# Altium PCB PLATE_FP_K2M_rev4_1.PcbDoc
Units mm, origin at the board's own origin, x right, y up, seen from the top; angles counter-clockwise.
Board outline 22.7 x 69.9 mm, 6 copper layers (Top Layer, Top, Mid-Layer 3, POW1, Mid-Layer 1, FLEX1, Mid-Layer 2, FLEX2, Mid-Layer 4, POW3, Bottom Layer, Bottom); 28 components, 14 nets, 104 pads, 64 vias.
Unrouted connection lines stored in the file: 3.
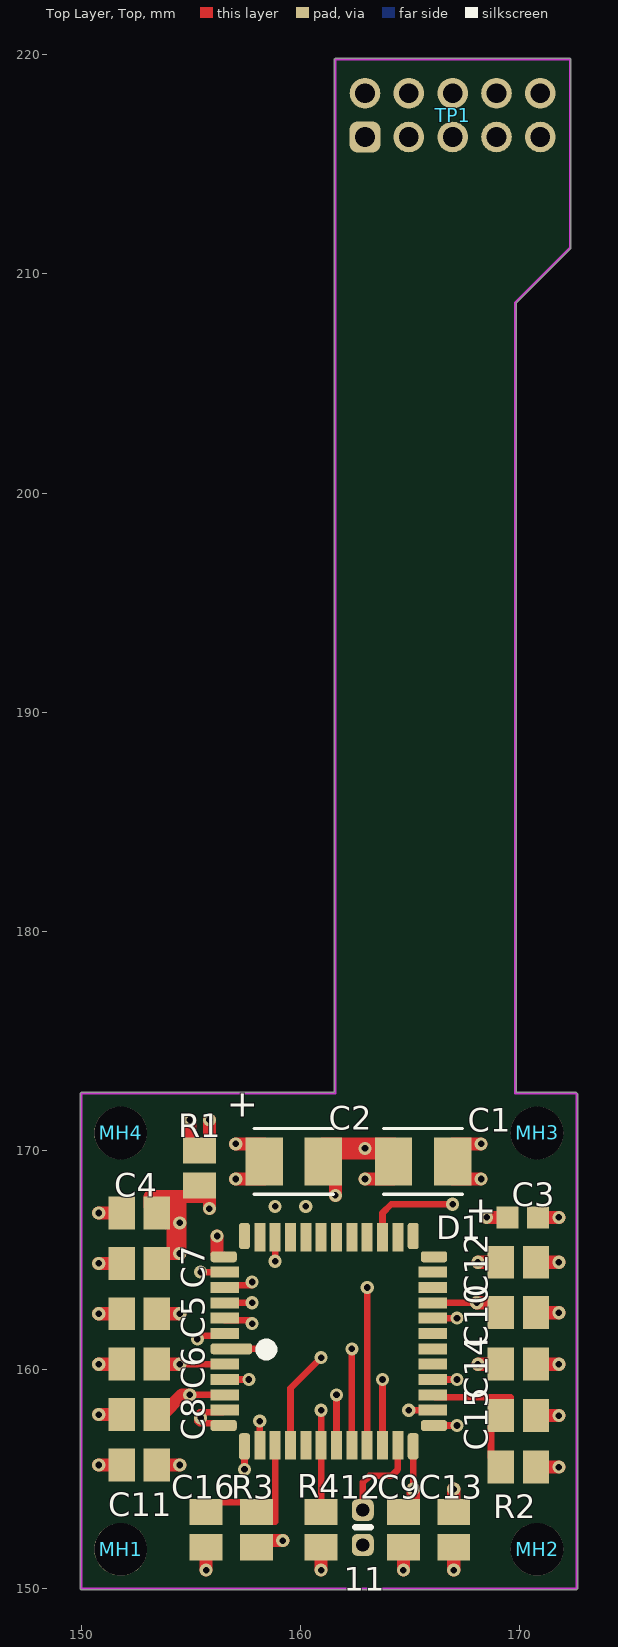
[diagram p0: Top Layer, Top view]
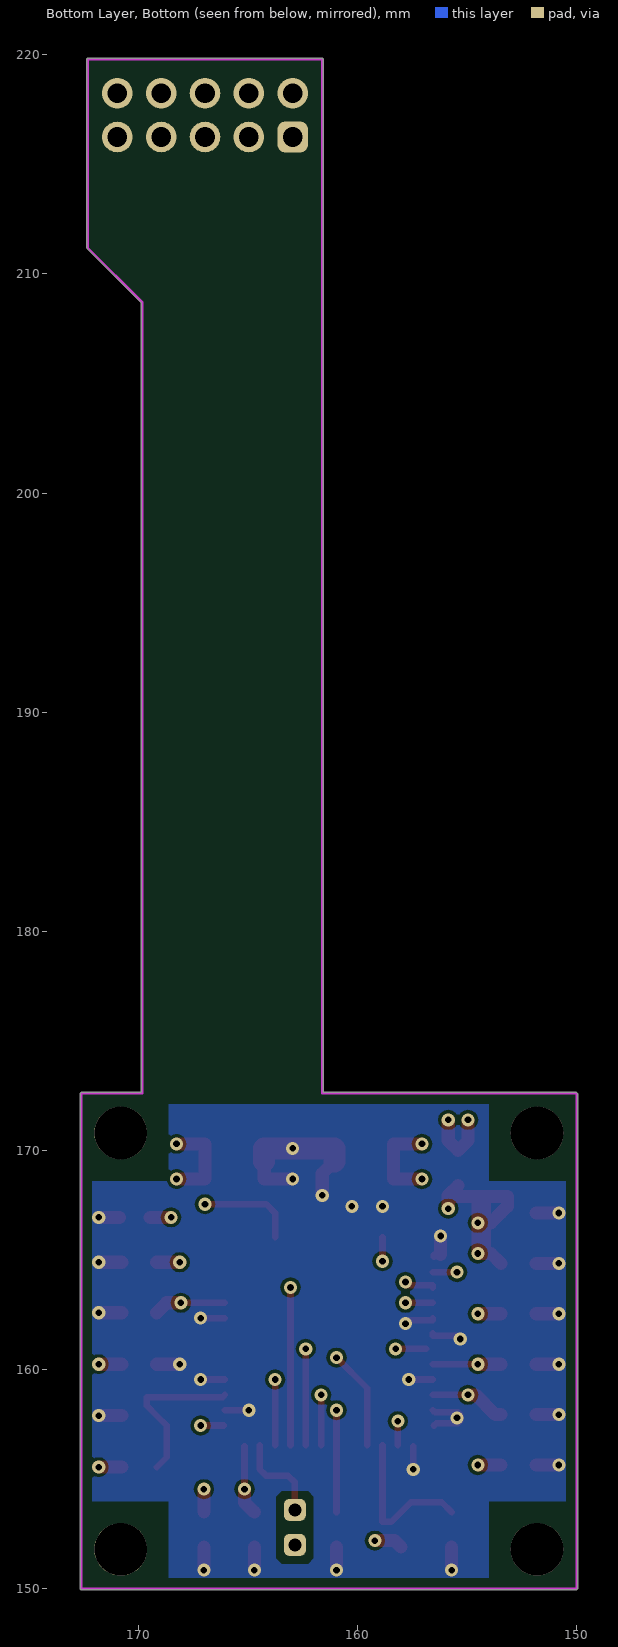
[diagram p1: Bottom Layer, Bottom view, seen from below]
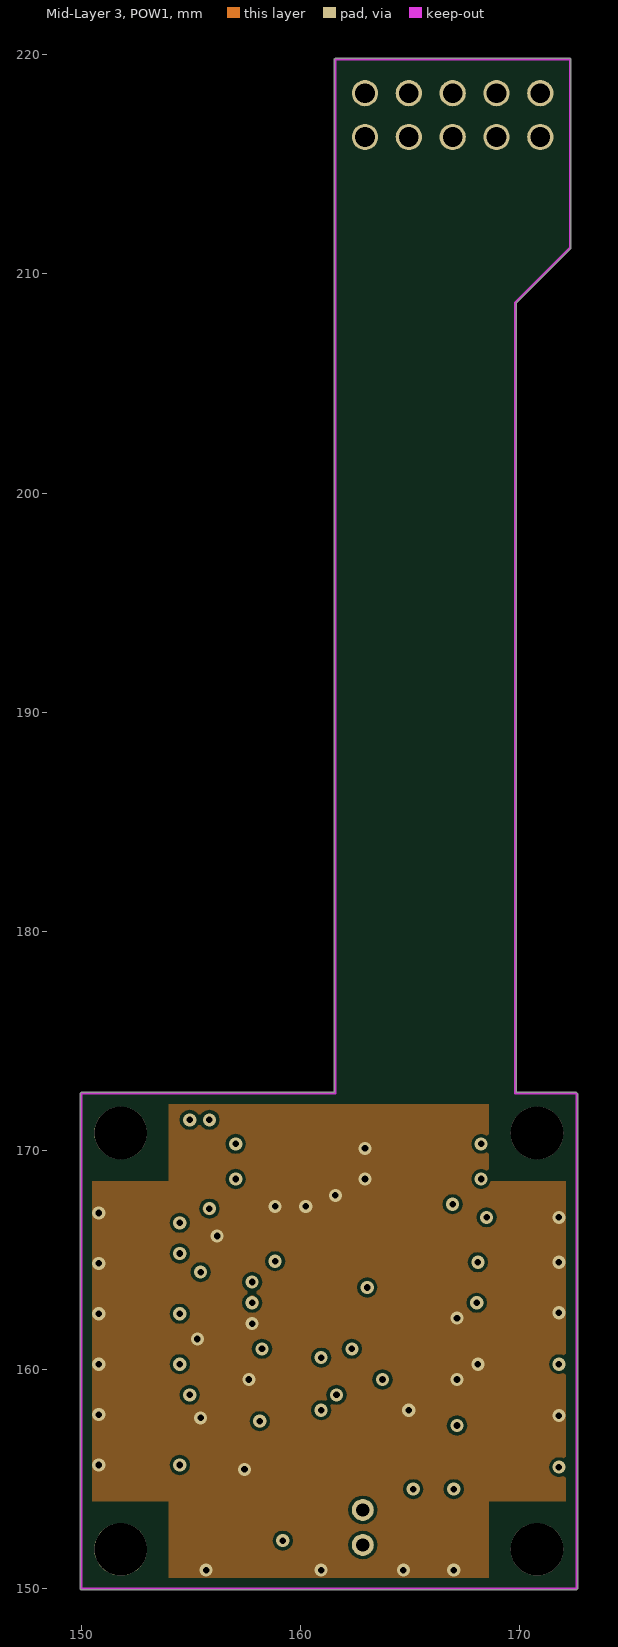
[diagram p2: Mid-Layer 3, POW1]
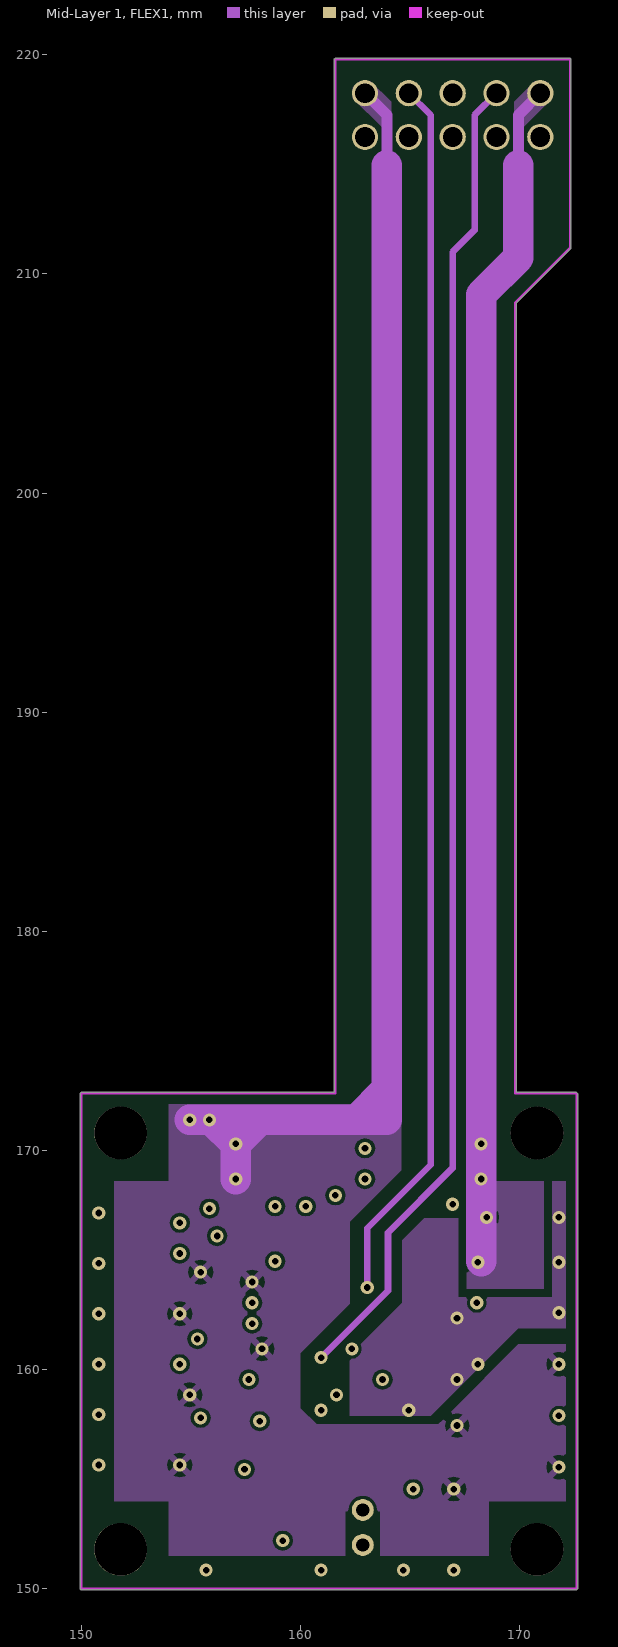
[diagram p3: Mid-Layer 1, FLEX1]
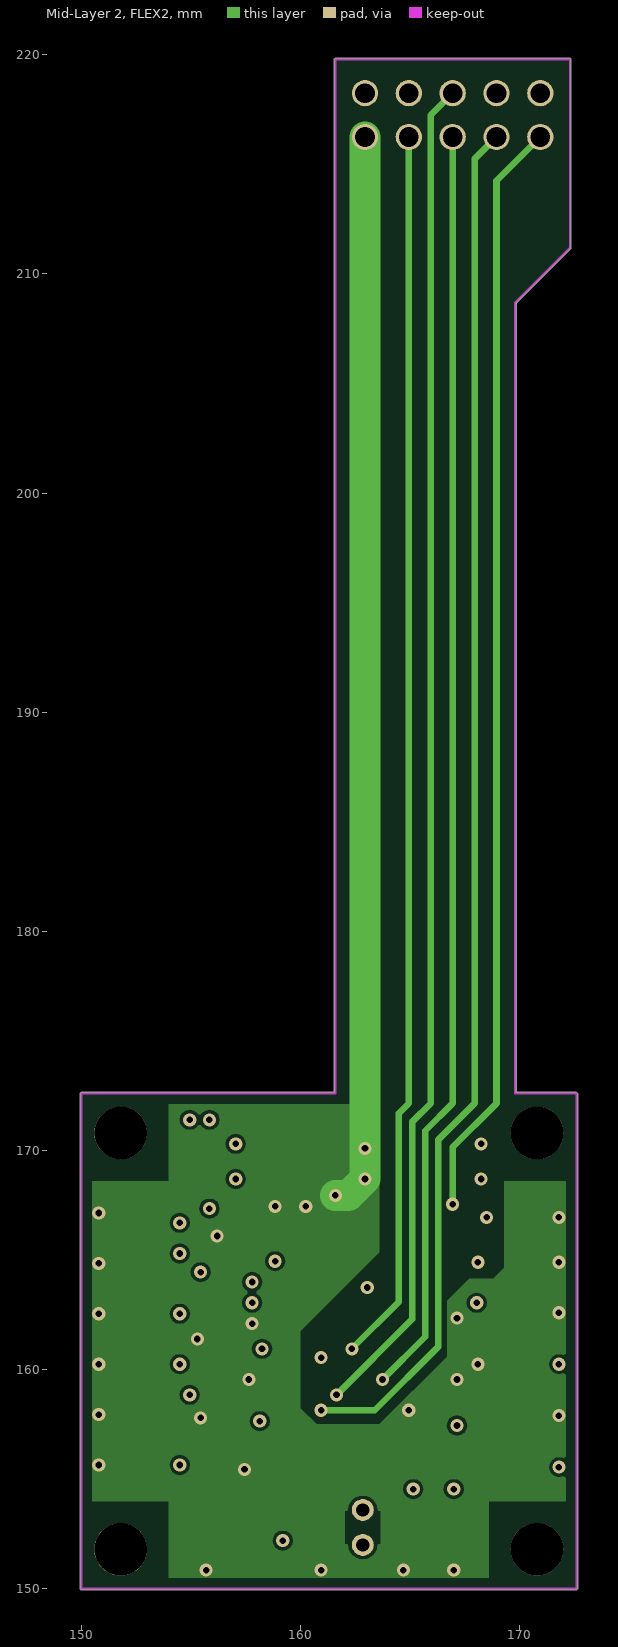
[diagram p4: Mid-Layer 2, FLEX2]
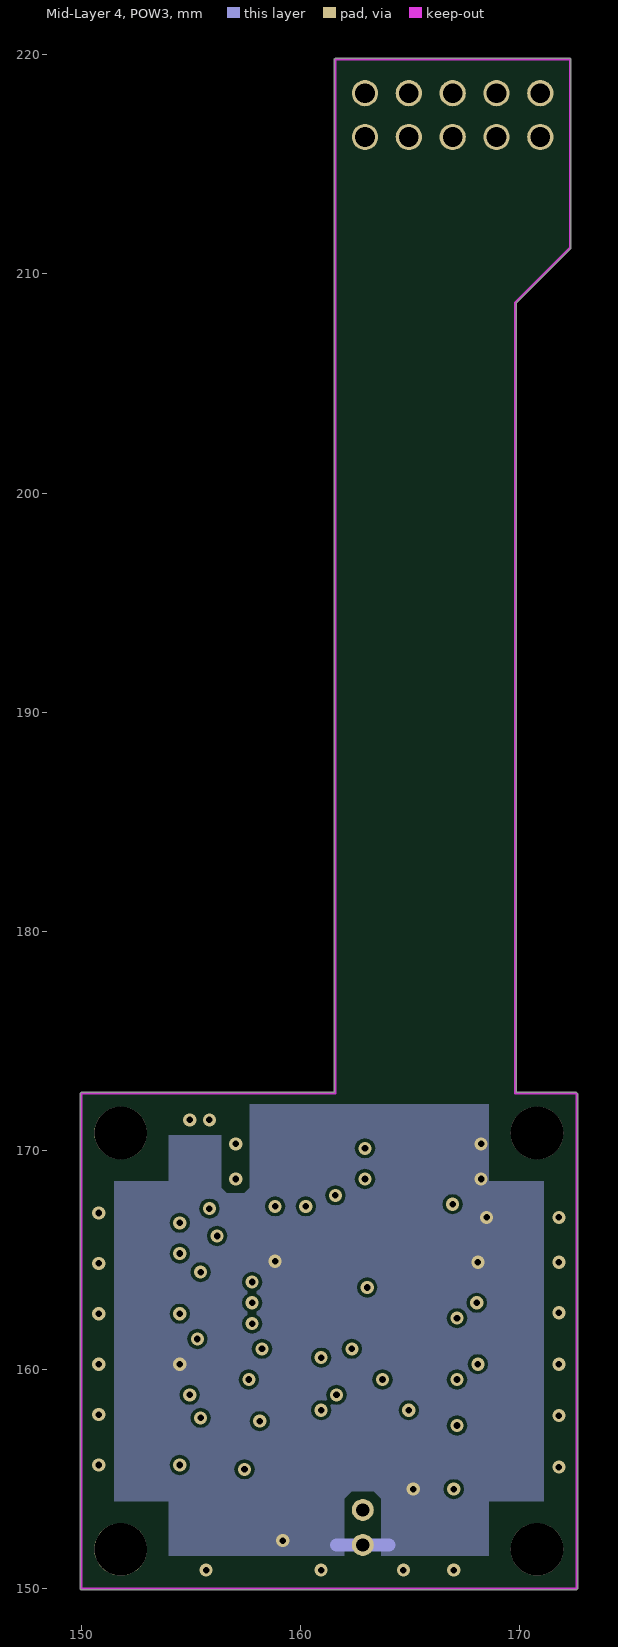
[diagram p5: Mid-Layer 4, POW3]

## Layer stack, top to bottom
Top Solder, Top Mask: solder mask 0.0102, Solder Resist, Dk 3.5
Top Layer, Top: signal copper 0.0356
Dielectric 1: dielectric 0.32, FR-4, Dk 4.8
Mid-Layer 3, POW1: signal copper 0.0356
Dielectric2: dielectric 0.32, FR-4, Dk 4.8
Mid-Layer 1, FLEX1: signal copper 0.0356
Dielectric3: dielectric 0.32, FR-4, Dk 4.8
Mid-Layer 2, FLEX2: signal copper 0.0356
Dielectric4: dielectric 0.32, FR-4, Dk 4.8
Mid-Layer 4, POW3: signal copper 0.0356
Dielectric5: dielectric 0.32, FR-4, Dk 4.8
Bottom Layer, Bottom: signal copper 0.0356
Bottom Solder, Bot Mask: solder mask 0.0102, Solder Resist, Dk 3.5

## Board outline
149.95,150 150,149.95 172.6,149.95 172.65,150 172.65,172.6 172.6,172.65 169.85,172.65 169.85,208.679 172.335,211.164 172.335,211.165 172.35,211.2 172.35,219.8 172.3,219.85 161.6,219.85 161.55,219.8 161.55,172.65 150,172.65 149.95,172.6

## Design rules (kind name [scope] priority, off if disabled: settings)
Clearance "Clearance_Top Layer, Top_PadToPad" [ExistsOnLayer('Top Layer, Top') And IsPad vs ExistsOnLayer('Top Layer, Top') And IsPad] p1: gap=0.15
Clearance "Clearance_Top Layer, Top_PadToLine" [ExistsOnLayer('Top Layer, Top') And IsPad vs ExistsOnLayer('Top Layer, Top') And IsWire] p2: gap=0.15
Clearance "Clearance_Top Layer, Top_LineToLine" [ExistsOnLayer('Top Layer, Top') And IsWire vs ExistsOnLayer('Top Layer, Top') And IsWire] p3: gap=0.15
Clearance "Clearance_Top Layer, Top_ViaToPad" [ExistsOnLayer('Top Layer, Top') And IsVia vs ExistsOnLayer('Top Layer, Top') And IsPad] p4: gap=0.15
Clearance "Clearance_Top Layer, Top_ViaToLine" [ExistsOnLayer('Top Layer, Top') And IsVia vs ExistsOnLayer('Top Layer, Top') And IsWire] p5: gap=0.15
Clearance "Clearance_Top Layer, Top_ViaToVia" [ExistsOnLayer('Top Layer, Top') And IsVia vs ExistsOnLayer('Top Layer, Top') And IsVia] p6: gap=0.15
Clearance "Clearance_Mid-Layer 3, POW1_PadToPad" [ExistsOnLayer('Mid-Layer 3, POW1') And IsPad vs ExistsOnLayer('Mid-Layer 3, POW1') And IsPad] p7: gap=0.15
Clearance "Clearance_Mid-Layer 3, POW1_PadToLine" [ExistsOnLayer('Mid-Layer 3, POW1') And IsPad vs ExistsOnLayer('Mid-Layer 3, POW1') And IsWire] p8: gap=0.15
Clearance "Clearance_Mid-Layer 3, POW1_LineToLine" [ExistsOnLayer('Mid-Layer 3, POW1') And IsWire vs ExistsOnLayer('Mid-Layer 3, POW1') And IsWire] p9: gap=0.15
Clearance "Clearance_Mid-Layer 3, POW1_ViaToPad" [ExistsOnLayer('Mid-Layer 3, POW1') And IsVia vs ExistsOnLayer('Mid-Layer 3, POW1') And IsPad] p10: gap=0.15
Clearance "Clearance_Mid-Layer 3, POW1_ViaToLine" [ExistsOnLayer('Mid-Layer 3, POW1') And IsVia vs ExistsOnLayer('Mid-Layer 3, POW1') And IsWire] p11: gap=0.15
Clearance "Clearance_Mid-Layer 3, POW1_ViaToVia" [ExistsOnLayer('Mid-Layer 3, POW1') And IsVia vs ExistsOnLayer('Mid-Layer 3, POW1') And IsVia] p12: gap=0.15
Clearance "Clearance_Mid-Layer 1, FLEX1_PadToPad" [ExistsOnLayer('Mid-Layer 1, FLEX1') And IsPad vs ExistsOnLayer('Mid-Layer 1, FLEX1') And IsPad] p13: gap=0.15
Clearance "Clearance_Mid-Layer 1, FLEX1_PadToLine" [ExistsOnLayer('Mid-Layer 1, FLEX1') And IsPad vs ExistsOnLayer('Mid-Layer 1, FLEX1') And IsWire] p14: gap=0.15
Clearance "Clearance_Mid-Layer 1, FLEX1_LineToLine" [ExistsOnLayer('Mid-Layer 1, FLEX1') And IsWire vs ExistsOnLayer('Mid-Layer 1, FLEX1') And IsWire] p15: gap=0.15
Clearance "Clearance_Mid-Layer 1, FLEX1_ViaToPad" [ExistsOnLayer('Mid-Layer 1, FLEX1') And IsVia vs ExistsOnLayer('Mid-Layer 1, FLEX1') And IsPad] p16: gap=0.15
Clearance "Clearance_Mid-Layer 1, FLEX1_ViaToLine" [ExistsOnLayer('Mid-Layer 1, FLEX1') And IsVia vs ExistsOnLayer('Mid-Layer 1, FLEX1') And IsWire] p17: gap=0.15
Clearance "Clearance_Mid-Layer 1, FLEX1_ViaToVia" [ExistsOnLayer('Mid-Layer 1, FLEX1') And IsVia vs ExistsOnLayer('Mid-Layer 1, FLEX1') And IsVia] p18: gap=0.15
Clearance "Clearance_Mid-Layer 2, FLEX2_PadToPad" [ExistsOnLayer('Mid-Layer 2, FLEX2') And IsPad vs ExistsOnLayer('Mid-Layer 2, FLEX2') And IsPad] p19: gap=0.15
Clearance "Clearance_Mid-Layer 2, FLEX2_PadToLine" [ExistsOnLayer('Mid-Layer 2, FLEX2') And IsPad vs ExistsOnLayer('Mid-Layer 2, FLEX2') And IsWire] p20: gap=0.15
Clearance "Clearance_Mid-Layer 2, FLEX2_LineToLine" [ExistsOnLayer('Mid-Layer 2, FLEX2') And IsWire vs ExistsOnLayer('Mid-Layer 2, FLEX2') And IsWire] p21: gap=0.15
Clearance "Clearance_Mid-Layer 2, FLEX2_ViaToPad" [ExistsOnLayer('Mid-Layer 2, FLEX2') And IsVia vs ExistsOnLayer('Mid-Layer 2, FLEX2') And IsPad] p22: gap=0.15
Clearance "Clearance_Mid-Layer 2, FLEX2_ViaToLine" [ExistsOnLayer('Mid-Layer 2, FLEX2') And IsVia vs ExistsOnLayer('Mid-Layer 2, FLEX2') And IsWire] p23: gap=0.15
Clearance "Clearance_Mid-Layer 2, FLEX2_ViaToVia" [ExistsOnLayer('Mid-Layer 2, FLEX2') And IsVia vs ExistsOnLayer('Mid-Layer 2, FLEX2') And IsVia] p24: gap=0.15
Clearance "Clearance_Mid-Layer 4, POW3_PadToPad" [ExistsOnLayer('Mid-Layer 4, POW3') And IsPad vs ExistsOnLayer('Mid-Layer 4, POW3') And IsPad] p25: gap=0.15
Clearance "Clearance_Mid-Layer 4, POW3_PadToLine" [ExistsOnLayer('Mid-Layer 4, POW3') And IsPad vs ExistsOnLayer('Mid-Layer 4, POW3') And IsWire] p26: gap=0.15
Clearance "Clearance_Mid-Layer 4, POW3_LineToLine" [ExistsOnLayer('Mid-Layer 4, POW3') And IsWire vs ExistsOnLayer('Mid-Layer 4, POW3') And IsWire] p27: gap=0.15
Clearance "Clearance_Mid-Layer 4, POW3_ViaToPad" [ExistsOnLayer('Mid-Layer 4, POW3') And IsVia vs ExistsOnLayer('Mid-Layer 4, POW3') And IsPad] p28: gap=0.15
Clearance "Clearance_Mid-Layer 4, POW3_ViaToLine" [ExistsOnLayer('Mid-Layer 4, POW3') And IsVia vs ExistsOnLayer('Mid-Layer 4, POW3') And IsWire] p29: gap=0.15
Clearance "Clearance_Mid-Layer 4, POW3_ViaToVia" [ExistsOnLayer('Mid-Layer 4, POW3') And IsVia vs ExistsOnLayer('Mid-Layer 4, POW3') And IsVia] p30: gap=0.15
Clearance "Clearance_Bottom Layer, Bottom_PadToPad" [ExistsOnLayer('Bottom Layer, Bottom') And IsPad vs ExistsOnLayer('Bottom Layer, Bottom') And IsPad] p31: gap=0.15
Clearance "Clearance_Bottom Layer, Bottom_PadToLine" [ExistsOnLayer('Bottom Layer, Bottom') And IsPad vs ExistsOnLayer('Bottom Layer, Bottom') And IsWire] p32: gap=0.15
Clearance "Clearance_Bottom Layer, Bottom_LineToLine" [ExistsOnLayer('Bottom Layer, Bottom') And IsWire vs ExistsOnLayer('Bottom Layer, Bottom') And IsWire] p33: gap=0.15
Clearance "Clearance_Bottom Layer, Bottom_ViaToPad" [ExistsOnLayer('Bottom Layer, Bottom') And IsVia vs ExistsOnLayer('Bottom Layer, Bottom') And IsPad] p34: gap=0.15
Clearance "Clearance_Bottom Layer, Bottom_ViaToLine" [ExistsOnLayer('Bottom Layer, Bottom') And IsVia vs ExistsOnLayer('Bottom Layer, Bottom') And IsWire] p35: gap=0.15
Clearance "Clearance_Bottom Layer, Bottom_ViaToVia" [ExistsOnLayer('Bottom Layer, Bottom') And IsVia vs ExistsOnLayer('Bottom Layer, Bottom') And IsVia] p36: gap=0.15
Clearance Clearance_Design_HoleToHole [(IsVia Or IsThruPin) vs (IsVia Or IsThruPin)] p37: gap=0.33
Clearance [All] p38: gap=0.15
PlaneClearance [All] p1: clearance=0.25
PolygonConnect PolygonConnect_16 [IsPolygon And InNet('GND') And OnLayer('Mid-Layer 3, POW1') vs IsVia] p1: connectstyle=Direct reliefconductorwidth=0.3 reliefentries=4 polygonreliefangle="90 Angle" airgapwidth=0.254
PolygonConnect PolygonConnect_15 [IsPolygon And InNet('GND') And OnLayer('Mid-Layer 3, POW1') vs IsPad] p2: connectstyle=Direct reliefconductorwidth=0.3 reliefentries=4 polygonreliefangle="90 Angle" airgapwidth=0.254
PolygonConnect PolygonConnect_14 [IsPolygon And InNet('NET00000') And OnLayer('Mid-Layer 3, POW1') vs IsVia] p3: connectstyle=Direct reliefconductorwidth=0.3 reliefentries=4 polygonreliefangle="90 Angle" airgapwidth=0.254
PolygonConnect PolygonConnect_13 [IsPolygon And InNet('NET00000') And OnLayer('Mid-Layer 3, POW1') vs IsPad] p4: connectstyle=Direct reliefconductorwidth=0.3 reliefentries=4 polygonreliefangle="90 Angle" airgapwidth=0.254
PolygonConnect PolygonConnect_12 [IsPolygon And InNet('3.3VA') And OnLayer('Mid-Layer 4, POW3') vs IsVia] p5: connectstyle=Direct reliefconductorwidth=0.3 reliefentries=4 polygonreliefangle="90 Angle" airgapwidth=0.254
PolygonConnect PolygonConnect_11 [IsPolygon And InNet('3.3VA') And OnLayer('Mid-Layer 4, POW3') vs IsPad] p6: connectstyle=Relief reliefconductorwidth=0.3 reliefentries=4 polygonreliefangle="45 Angle" airgapwidth=0.254
PolygonConnect PolygonConnect_10 [IsPolygon And InNet('GND') And OnLayer('Mid-Layer 2, FLEX2') vs IsVia] p7: connectstyle=Direct reliefconductorwidth=0.3 reliefentries=4 polygonreliefangle="90 Angle" airgapwidth=0.254
PolygonConnect PolygonConnect_9 [IsPolygon And InNet('GND') And OnLayer('Mid-Layer 2, FLEX2') vs IsPad] p8: connectstyle=Direct reliefconductorwidth=0.3 reliefentries=4 polygonreliefangle="90 Angle" airgapwidth=0.254
PolygonConnect PolygonConnect_8 [IsPolygon And InNet('GND') And OnLayer('Mid-Layer 1, FLEX1') vs IsVia] p9: connectstyle=Direct reliefconductorwidth=0.3 reliefentries=4 polygonreliefangle="90 Angle" airgapwidth=0.254
PolygonConnect PolygonConnect_7 [IsPolygon And InNet('GND') And OnLayer('Mid-Layer 1, FLEX1') vs IsPad] p10: connectstyle=Direct reliefconductorwidth=0.3 reliefentries=4 polygonreliefangle="90 Angle" airgapwidth=0.254
PolygonConnect PolygonConnect_6 [IsPolygon And InNet('3.3VA') And OnLayer('Mid-Layer 1, FLEX1') vs IsVia] p11: connectstyle=Relief reliefconductorwidth=0.3 reliefentries=4 polygonreliefangle="45 Angle" airgapwidth=0.254
PolygonConnect PolygonConnect_5 [IsPolygon And InNet('3.3VA') And OnLayer('Mid-Layer 1, FLEX1') vs IsPad] p12: connectstyle=Direct reliefconductorwidth=0.3 reliefentries=4 polygonreliefangle="90 Angle" airgapwidth=0.254
PolygonConnect PolygonConnect_4 [IsPolygon And InNet('1.8VA') And OnLayer('Mid-Layer 1, FLEX1') vs IsVia] p13: connectstyle=Relief reliefconductorwidth=0.3 reliefentries=4 polygonreliefangle="45 Angle" airgapwidth=0.254
PolygonConnect PolygonConnect_3 [IsPolygon And InNet('1.8VA') And OnLayer('Mid-Layer 1, FLEX1') vs IsPad] p14: connectstyle=Direct reliefconductorwidth=0.3 reliefentries=4 polygonreliefangle="90 Angle" airgapwidth=0.254
PolygonConnect PolygonConnect_2 [IsPolygon And InNet('GND') And OnLayer('Bottom Layer, Bottom') vs IsVia] p15: connectstyle=Direct reliefconductorwidth=0.3 reliefentries=4 polygonreliefangle="90 Angle" airgapwidth=0.254
PolygonConnect PolygonConnect_1 [IsPolygon And InNet('GND') And OnLayer('Bottom Layer, Bottom') vs IsPad] p16: connectstyle=Relief reliefconductorwidth=0.3 reliefentries=4 polygonreliefangle="45 Angle" airgapwidth=0.254
PolygonConnect [All] p17: connectstyle=Relief reliefconductorwidth=0.254 reliefentries=4 polygonreliefangle="90 Angle" airgapwidth=0.254
RoutingVias [All] p1: holewidth=0.711 width=1.27 viastyle="Through Hole" minholewidth=0.711 minwidth=1.27 maxholewidth=0.711 maxwidth=1.27
SolderMaskExpansion [All] p1: expansion=0.102
Width [All] p1: maxlimit=0.254 minlimit=0.254 preferedwidth=0.254
28 further rules are at their usual default settings.

## Components (designator, comment, footprint, x,y, rotation, side; value= is the part's Value field where it differs from the comment)
11 "" CONT_D1.0(0.6)MM 162.85,152 r0 top
12 "" CONT_D1.0(0.6)MM 162.85,153.6 r0 top
C1 "10 мкФ х 10 В" CE_3628M_B 166.95,169.5 r180 top
C2 "10 мкФ х 10 В" CE_3628M_B 158.35,169.5 r0 top
C3 "0,01 мкФ х 16 В" 1608M_I 169.45,166.95 r0 top
C4 "0,1 мкФ" 2012M_IV 153.45,167.15 r180 top
C5 "0,1 мкФ" 2012M_IV 153.45,162.55 r180 top
C6 "0,1 мкФ" 2012M_IV 153.45,160.25 r180 top
C7 "0,1 мкФ" 2012M_IV 153.45,164.85 r180 top
C8 "0,1 мкФ" 2012M_IV 153.45,157.95 r180 top
C9 "0,1 мкФ" 2012M_IV 164.7,153.5 r270 top
C10 "0,1 мкФ" 2012M_IV 169.15,162.6 r0 top
C11 "0,1 мкФ" 2012M_IV 153.45,155.65 r180 top
C12 "0,1 мкФ" 2012M_IV 169.15,164.9 r0 top
C13 "0,1 мкФ" 2012M_IV 167,153.5 r270 top
C14 "0,1 мкФ" 2012M_IV 170.75,160.25 r180 top
C15 "0,1 мкФ" 2012M_IV 169.15,157.9 r0 top
C16 "0,1 мкФ" 2012M_IV 155.7,153.5 r270 top
D1 "" CERAMIC_JLCC-48 161.3,161.3 r0 top
MH1 "" MH_M2.0_NONPLATED 151.8,151.8 r0 top
MH2 "" MH_M2.0_NONPLATED 170.8,151.8 r0 top
MH3 "" MH_M2.0_NONPLATED 170.8,170.8 r0 top
MH4 "" MH_M2.0_NONPLATED 151.8,170.8 r0 top
R1 "75 Ом" R1-12_2012M_0805 155.4,170 r270 top
R2 "1 кОм" R1-12_2012M_0805 170.75,155.55 r180 top
R3 "3 кОм" R1-12_2012M_0805 158,153.5 r270 top
R4 "20 кОм" R1-12_2012M_0805 160.95,153.5 r270 top
TP1 "" TMM-105-01-G-D_SAMTEC 166.95,217.25 r90 top

## Footprints (in the part's own frame and the unit in brackets; to place one, negate y for a bottom-side part, rotate by r counter-clockwise, add the part's x,y. Pads: shape width x height; smd on the part's side, far side on the other; paste and mask are expansions set on the pad)
1608M_I [mm]
  rect 1x1 smd: 1(0,0) 2(1.4,0)
2012M_IV [mm]
  rect 1.2x1.5 smd: 1(0,0) 2(1.6,0)
CE_3628M_B [mm]
  rect 1.7x2.2 smd: 1(0,0) 2(2.7,0)
  silkscreen extent -0.45,-1.5 3.15,1.5
CERAMIC_JLCC-48 [mm]
  rrect50% 1.9x0.5 smd: 1(-4.45,-0.35)
  rect 1.3x0.5 smd: 2(-4.75,-1.05) 3(-4.75,-1.75) 4(-4.75,-2.45) 5(-4.75,-3.15) 20(4.75,-3.15) 21(4.75,-2.45) 22(4.75,-1.75) 23(4.75,-1.05) 24(4.75,-0.35) 25(4.75,0.35) 26(4.75,1.05) 27(4.75,1.75) 28(4.75,2.45) 29(4.75,3.15) 44(-4.75,3.15) 45(-4.75,2.45) 46(-4.75,1.75) 47(-4.75,1.05) 48(-4.75,0.35)
  rrect50% 1.2x0.5 smd: 6(-4.8,-3.85) 19(4.8,-3.85) 30(4.8,3.85) 43(-4.8,3.85)
  rrect50% 0.5x1.2 smd: 7(-3.85,-4.8) 18(3.85,-4.8) 31(3.85,4.8) 42(-3.85,4.8)
  rect 0.5x1.3 smd: 8(-3.15,-4.75) 9(-2.45,-4.75) 10(-1.75,-4.75) 11(-1.05,-4.75) 12(-0.35,-4.75) 13(0.35,-4.75) 14(1.05,-4.75) 15(1.75,-4.75) 16(2.45,-4.75) 17(3.15,-4.75) 32(3.15,4.75) 33(2.45,4.75) 34(1.75,4.75) 35(1.05,4.75) 36(0.35,4.75) 37(-0.35,4.75) 38(-1.05,4.75) 39(-1.75,4.75) 40(-2.45,4.75) 41(-3.15,4.75)
  silkscreen extent -3.1,-0.63 -2.6,-0.13
CONT_D1.0(0.6)MM [mm]
  rrect50% 1x1 / inner round 1 / far side rrect50% 1x1 hole 0.6 mask-25.4: 1(0,0)
MH_M2.0_NONPLATED [mm]
  round 2.4 hole 2.4 unplated mask-25.4: 1(0,0)
R1-12_2012M_0805 [mm]
  rect 1.2x1.5 smd: 1(0,0) 2(1.6,0)
TMM-105-01-G-D_SAMTEC [mm]
  rrect50% 1.4x1.4 / inner round 1.2 / far side rrect50% 1.4x1.4 hole 0.9 mask-25.4: 1(-1,4)
  round 1.4 / inner round 1.2 / far side round 1.4 hole 0.9 mask-25.4: 2(1,4) 3(-1,2) 4(1,2) 5(-1,0) 6(1,0) 7(-1,-2) 8(1,-2) 9(-1,-4) 10(1,-4)

## Part data
C1 C2 C3 C4 C5 C6 C7 C8 C9 C10 C11 C12 C13 C14 C15 C16 D1 R1 R2 R3 R4 TP1: "{Description}"

## Via types
v1: diameter 0.6, hole 0.3, Top Layer, Top to Bottom Layer, Bottom, 64 vias

## Nets (pads, with @x,y where several pads share a name; then routed paths per layer and width w, separated by ;. In a path a pad name is that pad's centre, name@x,y a point inside that pad or via, vN(x,y) a via of type N, cw(c..) or ccw(c..) an arc to the next point about the centre after c; other vN are vias at no path point)
1.8VA: C2.1 C5.1 C8.1 C11.1 C13.1 C14.1 D1.1 D1.4 D1.19 D1.44 D1.45 R1.1 R2.1 TP1.2 | length 84.1
  Top Layer, Top w0.3: v1(154.95,158.85) D1.4 ; v1(155.45,164.45) D1.44 ; D1.45 156.55,163.85 157.8,163.85 v1(157.8,164) ; D1.1 v1(158.25,160.95) ; D1.19 v1(167.15,157.45)
  Top Layer, Top w0.6: C11.1 v1(154.5,155.65) ; C8.1 153.7,157.95 154.6,158.85 v1(154.95,158.85) ; C5.1 v1(154.5,162.55) ; v1(154.95,171.4) 154.95,170.45 R1.1 155.85,170.45 v1(155.85,171.4) ; v1(157.05,168.7) 158.35,168.7 C2.1 158.35,170.3 v1(157.05,170.3) ; C13.1 v1(167,154.55) ; R2.1 v1(171.8,155.55) ; C14.1 v1(171.8,160.25)
  Mid-Layer 1, FLEX1 w0.5: TP1.2 163.95,217.25 163.95,214.95
  Mid-Layer 1, FLEX1 w1.4: v1(154.95,171.4) v1(155.85,171.4) v1@155.95,171.4 ; v1(157.05,168.7) v1(157.05,170.3) ; 163.95,214.95 163.95,172.8 ; v1@155.95,171.4 v1(157.05,170.3) ; v1@155.95,171.4 158.15,171.4 ; v1(157.05,170.3) 158.15,171.4 ; 158.15,171.4 162.55,171.4 ; 162.55,171.4 163.95,172.8 ; 162.55,171.4 163.95,171.4 163.95,172.8
3.3VA: 11.1 C1.1 C3.1 C6.1 C9.1 C12.1 D1.2 D1.18 D1.40 R3.2 TP1.10 | length 72.1
  Top Layer, Top w0.3: v1(154.5,160.25) D1.2 ; v1(158.85,164.95) D1.40 ; v1(165.15,154.55) D1.18
  Top Layer, Top w0.6: C6.1 v1(154.5,160.25) ; R3.2 158.3,152.2 v1(159.2,152.2) ; C9.1 165.15,153.95 v1(165.15,154.55) ; v1(168.1,164.9) C12.1 ; v1(168.25,168.7) 166.95,168.7 C1.1 166.95,170.3 v1(168.25,170.3) ; v1(168.5,166.95) C3.1
  Mid-Layer 1, FLEX1 w0.5: 169.95,214.95 169.95,217.25 TP1.10
  Mid-Layer 1, FLEX1 w0.6: v1(168.1,164.9) 168.2,164.9 v1@168.25,164.95 ; v1@168.25,166.95 v1(168.5,166.95)
  Mid-Layer 1, FLEX1 w1.4: v1@168.25,164.95 168.25,166.95 v1(168.25,168.7) v1(168.25,170.3) 168.25,209.05 169.95,210.75 169.95,214.95
  Mid-Layer 4, POW3 w0.6: 161.65,152 11.1 164.05,152
CDRY: D1.33 TP1.9 | length 54.8
  Top Layer, Top w0.3: D1.33 163.75,167.15 164.15,167.55 v1(166.95,167.55)
  Mid-Layer 2, FLEX2 w0.3: v1(166.95,167.55) 166.95,170.15 168.95,172.15 168.95,214.25 TP1.9
ERUN: D1.12 R4.1 TP1.7 | length 70.7
  Top Layer, Top w0.3: R4.1 D1.12 ; D1.12 v1(160.95,158.15) ; D1.12 v1(160.95,158.15) ; D1.12 v1(160.95,158.15)
  Mid-Layer 2, FLEX2 w0.3: v1(160.95,158.15) 163.4,158.15 166.3,161.05 166.3,170.5 167.95,172.15 167.95,215.25 TP1.7
GND: C1.2 C2.2 C3.2 C4.2 C5.2 C6.2 C7.2 C8.2 C9.2 C10.2 C11.2 C12.2 C13.2 C14.2 C15.2 C16.2 D1.3 D1.5 D1.6 D1.7 D1.20 D1.22 D1.26 D1.43 D1.47 D1.48 R4.2 TP1.1 | length 86.6
  Top Layer, Top w0.3: v1(155.3,161.4) 155.3,161.55 156.55,161.55 D1.48 ; D1.43@156.2,165.25 156.5,165.25 D1.43 ; D1.6 156.4,157.55 v1@155.6,157.55 ; D1.5 156.45,158.05 v1@155.6,158.05 ; D1.3 v1(157.65,159.55) ; D1.47 156.55,162.25 157.8,162.25 v1(157.8,162.1) ; v1(157.45,155.45) D1.7 ; v1(164.95,158.15) D1.20 ; D1.22 v1(167.15,159.55) ; D1.26 v1(167.15,162.35) ; v1@155.3,157.8 155.3,157.65 155.4,157.55 v1@155.6,157.55 ; v1@155.3,157.8 155.3,157.95 155.4,158.05 v1@155.6,158.05 ; v1@155.3,157.8 v1(155.45,157.8) v1@155.6,157.8 ; v1@155.6,157.55 v1@155.6,157.8 ; v1@155.6,157.8 v1@155.6,158.05
  Top Layer, Top w0.6: v1(150.8,155.65) C11.2 ; v1(150.8,157.95) C8.2 ; v1(150.8,160.25) C6.2 ; v1(150.8,162.55) C5.2 ; v1(150.8,164.85) C7.2 ; v1(150.8,167.15) C4.2 ; v1(155.7,150.85) C16.2 ; D1.43@156.2,165.25 v1(156.2,166.1) ; v1(160.95,150.85) R4.2 ; C2.2 161.6,168.95 v1(161.6,167.95) ; v1(162.95,168.7) 164.25,168.7 C1.2 ; v1(164.7,150.85) C9.2 ; v1(167,150.85) C13.2 ; v1(168.1,160.25) C14.2 ; C15.2 v1(171.8,157.9) ; C10.2 v1(171.8,162.6) ; C12.2 v1(171.8,164.9) ; C3.2 v1(171.8,166.95)
  Top Layer, Top w1: C2.2 161.05,170.1 v1(162.95,170.1) 164.25,170.1 C1.2
  Mid-Layer 2, FLEX2 w1.4: v1(161.6,167.95) 162.2,167.95 v1(162.95,168.7) v1(162.95,170.1) TP1.1
  other v1: 158.85,167.45 160.25,167.45
MISO: D1.16 TP1.5 | length 61
  Top Layer, Top w0.3: D1.16 v1(163.75,159.55)
  Mid-Layer 2, FLEX2 w0.3: v1(163.75,159.55) 165.7,161.5 165.7,170.9 166.95,172.15 TP1.5
MOSI: D1.15 TP1.4 | length 63.3
  Top Layer, Top w0.3: D1.15 v1(163.05,163.75)
  Mid-Layer 1, FLEX1 w0.3: v1(163.05,163.75) 163.05,166.45 165.95,169.35 165.95,217.25 TP1.4
NET00000: C4.1 C7.1 C10.1 D1.8 D1.27 D1.46 R1.2 | length 18.1
  Top Layer, Top w0.3: D1.46 v1(157.8,163.05) ; D1.8 v1(158.15,157.65) ; D1.27 v1(168.05,163.05)
  Top Layer, Top w0.6: C7.1 153.9,165.3 154.2,165.3 ; R1.2 155.85,167.95 R1.2@155.85,167.9 ; v1(155.85,167.35) R1.2@155.85,167.9 ; v1(168.05,163.05) 168.7,163.05 C10.1 ; 154.2,165.3 v1(154.5,165.3) v1(154.5,166.7) ; 154.2,165.3 154.2,166.7 ; 154.2,166.7 v1(154.5,166.7) ; 154.2,166.7 153.9,166.7 C4.1 153.15,167.45 153.15,167.9 154.2,167.9 ; 154.2,166.7 154.2,167.9 ; 154.2,167.9 154.5,167.9 ; v1(154.5,166.7) 154.5,167.9 ; 154.5,167.9 R1.2@155.85,167.9
NET00001: C15.1 D1.21 R2.2 | length 7.4
  Top Layer, Top w0.3: D1.21 166.15,158.75 169.6,158.75 169.6,158.35 C15.1 168.7,157.45 168.7,156 R2.2
NET00002: 12.1 D1.17 | length 4.2
  Top Layer, Top w0.3: 12.1 162.85,154.85 163.15,155.15 164.15,155.15 164.45,155.45 D1.17
NRST: C16.1 D1.9 R3.1 | length 7.2
  Top Layer, Top w0.3: C16.1 156.15,153.95 157.55,153.95 R3.1 158.45,153.05 158.85,153.05 D1.9
SCLK: D1.14 TP1.3 | length 60.8
  Top Layer, Top w0.3: D1.14 v1(162.35,160.95)
  Mid-Layer 2, FLEX2 w0.3: v1(162.35,160.95) 164.5,163.1 164.5,171.7 164.95,172.15 TP1.3
SCS: D1.13 TP1.6 | length 63.9
  Top Layer, Top w0.3: D1.13 v1(161.65,158.85)
  Mid-Layer 2, FLEX2 w0.3: v1(161.65,158.85) 165.1,162.3 165.1,171.3 165.95,172.15 165.95,217.25 TP1.6
XI: D1.10 TP1.8 | length 65.6
  Top Layer, Top w0.3: D1.10 159.55,159.15 v1(160.95,160.55)
  Mid-Layer 1, FLEX1 w0.3: v1(160.95,160.55) 164,163.6 164,166.25 166.95,169.2 166.95,211 167.95,212 167.95,217.25 TP1.8
pads on no net: D1.11 D1.23 D1.24 D1.25 D1.28 D1.29 D1.30 D1.31 D1.32 D1.34 D1.35 D1.36 D1.37 D1.38 D1.39 D1.41 D1.42 MH1.1 MH2.1 MH3.1 MH4.1

## Polygon pours and split planes (outlines as drawn)
GND on Bottom Layer, Bottom "Bottom Layer, Bottom-GND" (solid, remove dead copper, pour order 2): 172.1,150.5 172.1,172.1 150.5,172.1 150.5,150.5
1.8VA on Mid-Layer 1, FLEX1 "Mid-Layer 1, FLEX1-1.8VA" (solid, remove dead copper, pour order 4): 164.15,216.675 164.15,217.85 163.2,218.8 162.7,218.8 162.4,218.5 162.4,218.025 163.75,216.675
3.3VA on Mid-Layer 1, FLEX1 "Mid-Layer 1, FLEX1-3.3VA" (solid, remove dead copper, pour order 6): 170.15,216.675 171.5,218.025 171.5,218.5 171.2,218.8 170.7,218.8 169.75,217.85 169.75,216.675
3.3VA on Mid-Layer 1, FLEX1 "Mid-Layer 1, FLEX1-3.3VA 1" (solid, remove dead copper, pour order 8): 167.6,163.7 171.1,163.7 171.1,172.1 167.6,172.1
GND on Mid-Layer 1, FLEX1 "Mid-Layer 1, FLEX1-GND" (solid, remove dead copper, pour order 10): 162.25,162.05 162.25,157.9 165.95,157.9 169.95,161.9 172.1,161.9 172.1,168.6 171.5,168.6 171.5,163.3 167.2,163.3 167.2,166.9 164.45,166.9 163.85,166.3 163.85,163.65
1.8VA on Mid-Layer 1, FLEX1 "Mid-Layer 1, FLEX1-1.8VA 1" (solid, remove dead copper, pour order 12): 172.1,151.5 172.1,172.1 151.5,172.1 151.5,151.5
GND on Mid-Layer 2, FLEX2 "Mid-Layer 2, FLEX2-GND" (solid, remove dead copper, pour order 14): 154,172.1 154,168.6 150.5,168.6 150.5,154 154,154 154,150.5 168.6,150.5 168.6,154 172.1,154 172.1,168.6 169.3,168.6 169.3,164.65 168.8,164.15 167.7,164.15 166.7,163.15 166.7,160.6 163.6,157.5 160.75,157.5 160,158.25 160,161.75 163.6,165.35 163.6,168.1 163.6,172.1
3.3VA on Mid-Layer 4, POW3 "Mid-Layer 4, POW3-3.3VA" (solid, remove dead copper, pour order 16): 171.1,151.5 171.1,172.1 151.5,172.1 151.5,151.5
NET00000 on Mid-Layer 3, POW1 "Mid-Layer 3, POW1-NET00000" (solid, remove dead copper, pour order 18): 169.15,157.9 169.15,163.65 168.65,164.15 167.7,164.15 167.2,164.65 167.2,166.2 166.7,166.7 158.05,166.7 156.15,168.6 153.45,168.6 153.45,157.9 154.95,156.4 167.65,156.4
GND on Mid-Layer 3, POW1 "Mid-Layer 3, POW1-GND" (solid, remove dead copper, pour order 20): 172.1,150.5 172.1,172.1 150.5,172.1 150.5,150.5

## Keep-outs
Keep-Out Layer, Board:
  lines w0.1: 150,150 150,172.6 161.6,172.6 161.6,219.8 172.3,219.8 172.3,211.2 169.8,208.7 169.8,172.6 172.6,172.6 172.6,150 150,150

## Other copper
Mid-Layer 1, FLEX1:
  pour cut-out: 162.05,151.4 163.65,151.4 163.65,153.55 162.05,153.55
  pour cut-out: 172.6,150 172.6,154 168.6,154 168.6,150
  pour cut-out: 150,172.6 150,168.6 154,168.6 154,172.6
  pour cut-out: 150,150 154,150 154,154 150,154
  pour cut-out: 167.2,172.6 167.2,163.3 171.5,163.3 171.5,168.6 172.6,168.6 172.6,172.6 168.9,172.6 168.9,168.6 171.1,168.6 171.1,163.7 167.55,163.7 167.55,172.6
  pour cut-out: 164.6,172.6 164.6,169.1 162.25,166.75 162.25,163 160,160.75 160,158.25 160.75,157.5 166.3,157.5 169.95,161.15 172.6,161.15 172.6,161.9 169.95,161.9 165.95,157.9 162.25,157.9 162.25,160.65 164.65,163.05 164.65,165.9 167.6,168.85 167.6,172.6
Mid-Layer 2, FLEX2:
  pour cut-out: 162.05,152.05 163.65,152.05 163.65,153.55 162.05,153.55
Mid-Layer 3, POW1:
  pour cut-out: 168.6,172.6 168.6,168.6 172.6,168.6 172.6,172.6
  pour cut-out: 168.6,154 168.6,150 172.6,150 172.6,154
  pour cut-out: 150,172.6 150,168.6 154,168.6 154,172.6
  pour cut-out: 150,154 150,150 154,150 154,154
Mid-Layer 4, POW3:
  pour cut-out: 172.6,172.6 168.6,172.6 168.6,168.6 172.6,168.6
  pour cut-out: 162,151.45 163.7,151.45 163.7,154.1 163.35,154.45 162.35,154.45 162,154.1
  pour cut-out: 172.6,150 172.6,154 168.6,154 168.6,150
  pour cut-out: 150,150 154,150 154,154 150,154
  pour cut-out: 150,172.6 150,168.6 154,168.6 154,170.7 156.4,170.7 156.4,168.3 156.65,168.05 157.45,168.05 157.7,168.3 157.7,172.6
Bottom Layer, Bottom:
  pour cut-out: 172.6,172.6 168.6,172.6 168.6,168.6 172.6,168.6
  pour cut-out: 162,151.4 162.25,151.15 163.45,151.15 163.7,151.4 163.7,154.2 163.45,154.45 162.25,154.45 162,154.2
  pour cut-out: 172.6,150 172.6,154 168.6,154 168.6,150
  pour cut-out: 150,172.6 150,168.6 154,168.6 154,172.6
  pour cut-out: 150,150 154,150 154,154 150,154

## Silkscreen, mask and mechanical layers (free items; w line width, h text height)
Top Overlay, Top Silk:
  lines w0.3: 162.5,152.8 163.2,152.8
Mechanical 1, Top Assy:
  circle w0.25: c162.85,153.6 r0.38
  circle w0.25: c164.95,218.25 r0.6
  circle w0.25: c162.95,218.25 r0.6
  circle w0.25: c164.95,216.25 r0.6
  circle w0.25: c162.95,216.25 r0.55
  circle w0.25: c168.95,218.25 r0.6
  circle w0.25: c170.95,218.25 r0.6
  circle w0.25: c168.95,216.25 r0.6
  circle w0.25: c170.95,216.25 r0.6
  circle w0.25: c162.85,152 r0.38
  circle w0.25: c166.95,218.25 r0.6
  circle w0.25: c166.95,216.25 r0.6
  region: 162.25,215.8 162.3,215.7 162.4,215.6 162.5,215.55 163.35,215.55 163.5,215.6 163.6,215.7 163.65,215.8 163.65,216.3 163.4,216.3 163.4,215.8 162.5,215.8 162.5,216.3 162.25,216.3
  region: 163.65,216.7 163.6,216.8 163.5,216.9 163.4,216.95 162.55,216.95 162.4,216.9 162.3,216.8 162.25,216.7 162.25,216.2 162.5,216.2 162.5,216.7 163.4,216.7 163.4,216.2 163.65,216.2
  lines w0.1: 145,145 145.5,145 ; 174.5,225 175,225
  text "2" at 162.553,219.8 h1.41
  text "4" at 164.553,219.8 h1.41
  text "6" at 166.553,219.8 h1.41
  text "8" at 168.553,219.8 h1.41
  text "10" at 170.156,219.8 h1.41
  text "1" at 162.553,213.024 h1.41
  text "3" at 164.553,213.024 h1.41
  text "5" at 166.553,213.024 h1.41
  text "7" at 168.553,213.024 h1.41
  text "9" at 170.553,213.024 h1.41
Mechanical 3, Board1:
  lines w0.1: 150,150 150,172.6 172.6,172.6 172.6,150 150,150 ; 161.6,214.7 161.6,219.8 172.3,219.8 172.3,214.7 161.6,214.7

## Text inside footprints (layer, text, board x,y; h text height)
C1: Top Overlay, Top Silk "+" at 167.525,166.7 h1.25
C2: Top Overlay, Top Silk "+" at 158.075,172.6 h1.25 r180